# EAGLE board 0 TO 9 Counter 74LS90 (EAGLE 7.6.0)

Size 37 x 71 mm. Coordinates in mm from the lower left corner, seen from the top.
Outline: 0,0 37,0 37,71 0,71 0,0
Copper layers (1*16): Top 0.035mm / dielectric 1.5mm / Bottom 0.035mm
Design rules "default": minimum track width 10mil, minimum drill 24mil, track to track 8mil, track to pad 8mil, pad to pad 8mil, via to via 8mil, smd to smd 8mil, copper to edge 40mil, drill to drill 8mil, minimum pad ring 10mil, minimum via ring 8mil, stop-mask expansion 4mil, vias tented up to drill 0mil, thermal gap 10mil

## Footprints (pad centres in the part's own frame; a part is rotated, then mirrored left to right if it is on the bottom)
DIL16 = drill 0.813 long: 1 -8.89,-3.81; 2 -6.35,-3.81; 3 -3.81,-3.81; 4 -1.27,-3.81; 5 1.27,-3.81; 6 3.81,-3.81; 7 6.35,-3.81; 8 8.89,-3.81; 9 8.89,3.81; 10 6.35,3.81; 11 3.81,3.81; 12 1.27,3.81; 13 -1.27,3.81; 14 -3.81,3.81; 15 -6.35,3.81; 16 -8.89,3.81
7SEG-13 = drill 0.813 long: 1 -5.08,-7.62; 2 -2.54,-7.62; 3 0,-7.62; 4 2.54,-7.62; 5 5.08,-7.62; 6 5.08,7.62; 7 2.54,7.62; 8 0,7.62; 9 -2.54,7.62; 10 -5.08,7.62
1X04 = drill 1.016 long: 1 -3.81,0; 2 -1.27,0; 3 1.27,0; 4 3.81,0
R1206 = smd 1.6 x 1.803: 1 -1.422,0; 2 1.422,0
DIL14 = drill 0.813 long: 1 -7.62,-3.81; 2 -5.08,-3.81; 3 -2.54,-3.81; 4 0,-3.81; 5 2.54,-3.81; 6 5.08,-3.81; 7 7.62,-3.81; 8 7.62,3.81; 9 5.08,3.81; 10 2.54,3.81; 11 0,3.81; 12 -2.54,3.81; 13 -5.08,3.81; 14 -7.62,3.81

## Placement (x,y rotation side)
74LS47N_0  74LS47N  [DIL16]  21,37.5 270 top
74LS47N_1  74LS47N  [DIL16]  8,37.5 270 top
DIGIT_0_ANODE  [7SEG-13]  22,60 0 top
DIGIT_1_ANODE  [7SEG-13]  8,60 0 top
JP_CLOCK_IN  [1X04]  18,2 0 top
OUTPUTS  [1X04]  34.5,6.5 270 top
R_100O_0  [R1206]  31.5,55.5 270 top
R_100O_1  [R1206]  31,64 270 top
SN74LS90N_0  74LS90N  [DIL14]  21,15.5 270 top
SN74LS90N_1  74LS90N  [DIL14]  8,15.5 270 top

## Library data of the parts
74LS47N_0 74LS47N_1 SN74LS90N_0 SN74LS90N_1 = 74xx-us
DIGIT_0_ANODE DIGIT_1_ANODE = special
JP_CLOCK_IN OUTPUTS = pinhead
R_100O_0 R_100O_1 = adafruit

## Nets
BIT_0: 74LS47N_0.7 SN74LS90N_0.1 SN74LS90N_0.12
BIT_1: 74LS47N_0.1 SN74LS90N_0.9
BIT_2: 74LS47N_0.2 SN74LS90N_0.8
BIT_2_0: 74LS47N_1.7 SN74LS90N_1.1 SN74LS90N_1.12
BIT_2_1: 74LS47N_1.1 SN74LS90N_1.9
BIT_2_2: 74LS47N_1.2 SN74LS90N_1.8
BIT_2_3: 74LS47N_1.6 SN74LS90N_1.11
BIT_3: 74LS47N_0.6 SN74LS90N_0.11 SN74LS90N_1.14
GND: 74LS47N_0.8 74LS47N_1.8 JP_CLOCK_IN.1 OUTPUTS.1 SN74LS90N_0.2 SN74LS90N_0.3 SN74LS90N_0.6 SN74LS90N_0.7 SN74LS90N_0.10 SN74LS90N_1.2 SN74LS90N_1.3 SN74LS90N_1.6 SN74LS90N_1.7 SN74LS90N_1.10
N$1: DIGIT_0_ANODE.8 R_100O_0.1
N$2: DIGIT_1_ANODE.8 R_100O_1.1
SEG_1_DA: 74LS47N_0.13 DIGIT_0_ANODE.7
SEG_1_DB: 74LS47N_0.12 DIGIT_0_ANODE.6
SEG_1_DC: 74LS47N_0.11 DIGIT_0_ANODE.4
SEG_1_DD: 74LS47N_0.10 DIGIT_0_ANODE.2
SEG_1_DE: 74LS47N_0.9 DIGIT_0_ANODE.1
SEG_1_DF: 74LS47N_0.15 DIGIT_0_ANODE.9
SEG_1_DG: 74LS47N_0.14 DIGIT_0_ANODE.10
SEG_2_DA: 74LS47N_1.13 DIGIT_1_ANODE.7
SEG_2_DB: 74LS47N_1.12 DIGIT_1_ANODE.6
SEG_2_DC: 74LS47N_1.11 DIGIT_1_ANODE.4
SEG_2_DD: 74LS47N_1.10 DIGIT_1_ANODE.2
SEG_2_DE: 74LS47N_1.9 DIGIT_1_ANODE.1
SEG_2_DF: 74LS47N_1.15 DIGIT_1_ANODE.9
SEG_2_DG: 74LS47N_1.14 DIGIT_1_ANODE.10
TMR555_OUTPUT: JP_CLOCK_IN.3 OUTPUTS.3 SN74LS90N_0.14
TMR555_OUTPUT_REVERSE: JP_CLOCK_IN.4 OUTPUTS.4
VCC: 74LS47N_0.3 74LS47N_0.4 74LS47N_0.5 74LS47N_0.16 74LS47N_1.3 74LS47N_1.4 74LS47N_1.5 74LS47N_1.16 JP_CLOCK_IN.2 OUTPUTS.2 R_100O_0.2 R_100O_1.2 SN74LS90N_0.5 SN74LS90N_1.5

## Tracks (layer width: path | path; a pad name or v marks a point on that pad's centre or on a via)
BIT_0  (2 unrouted)
BIT_1  (1 unrouted)
BIT_2  (1 unrouted)
BIT_2_0  (2 unrouted)
BIT_2_1  (1 unrouted)
BIT_2_2  (1 unrouted)
BIT_2_3  (1 unrouted)
BIT_3  (2 unrouted)
GND  (13 unrouted)
N$1  (1 unrouted)
N$2  (1 unrouted)
SEG_1_DA  (1 unrouted)
SEG_1_DB  (1 unrouted)
SEG_1_DC  (1 unrouted)
SEG_1_DD  (1 unrouted)
SEG_1_DE  (1 unrouted)
SEG_1_DF  (1 unrouted)
SEG_1_DG  (1 unrouted)
SEG_2_DA  (1 unrouted)
SEG_2_DB  (1 unrouted)
SEG_2_DC  (1 unrouted)
SEG_2_DD  (1 unrouted)
SEG_2_DE  (1 unrouted)
SEG_2_DF  (1 unrouted)
SEG_2_DG  (1 unrouted)
TMR555_OUTPUT  (2 unrouted)
TMR555_OUTPUT_REVERSE  (1 unrouted)
VCC  (13 unrouted)

## Text on the board
tNames: 0 To 99 Counter | GND | VCC | OUT | GND | VCC | OUT | OUT_R | OUT_R | INPUTS
bNames: MadeInTheUSB.net | https://bit.ly/2ZEPbGB | PCBv2 - 2019.09